# EAGLE board d11_usb_std (EAGLE 7.3.0)
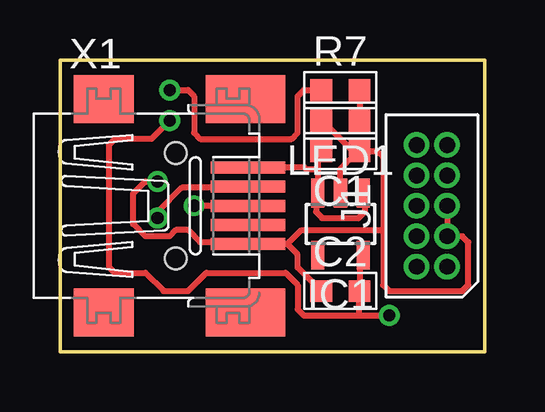
[diagram p0: board, top side]
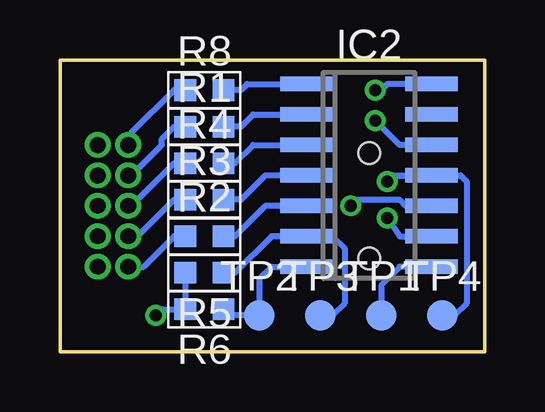
[diagram p1: board, bottom side, seen from below]

Size 17.7 x 12.18 mm. Coordinates in mm from the lower left corner, seen from the top.
Outline: 0,0 17.7,0 17.7,12.18 0,12.18 0,0
Copper layers (1*16): Top 0.0356mm / dielectric 1.5011mm / Bottom 0.0356mm
Design rules "OSHPark": minimum track width 6mil, minimum drill 13mil, track to track 6mil, track to pad 6mil, pad to pad 6mil, via to via 6mil, smd to smd 6mil, copper to edge 15mil, drill to drill 6mil, minimum pad ring 7mil, minimum via ring 7mil, stop-mask expansion 3mil, vias tented up to drill 0mil, thermal gap 10mil

## Footprints (pad centres in the part's own frame; a part is rotated, then mirrored left to right if it is on the bottom)
SMD0603 = smd 0.9 x 0.9: 1 -0.8,0; 2 0.8,0
SOT23-5 = smd 0.55 x 1.2: 1 -0.95,-1.3; 2 0,-1.3; 3 0.95,-1.3; 4 0.95,1.3; 5 -0.95,1.3
SO-14 = smd 0.6 x 2.2: 1 -3.81,-2.6; 2 -2.54,-2.6; 3 -1.27,-2.6; 4 0,-2.6; 5 1.27,-2.6; 6 2.54,-2.6; 7 3.81,-2.6; 8 3.81,2.6; 9 2.54,2.6; 10 1.27,2.6; 11 0,2.6; 12 -1.27,2.6; 13 -2.54,2.6; 14 -3.81,2.6
HEADER-5X2-1.27MM = drill 0.66 pad 1.067: 1 -2.54,-0.635; 2 -2.54,0.635; 3 -1.27,-0.635; 4 -1.27,0.635; 5 0,-0.635; 6 0,0.635; 7 1.27,-0.635; 8 1.27,0.635; 9 2.54,-0.635; 10 2.54,0.635
TP-1.27MM = smd 1.27 x 1.27: 1 0,0
32005-201 = smd 3.1 x 0.5: 1 3,1.6; 2 3,0.8; 3 3,0; 4 3,-0.8; 5 3,-1.6 | smd 2.5 x 2: M1 -3,-4.45; M2 -3,4.45 | smd 3.3 x 2: M3 2.9,4.45; M4 2.9,-4.45 | hole 0.9: 0,2.2; 0,-2.2

## Placement (x,y rotation side)
C1  1uF  [SMD0603]  11.68,8.38 180 top
C2  1uF  [SMD0603]  11.68,2.54 0 top
IC1  MIC5504-3.3  [SOT23-5]  11.68,5.33 180 top
IC2  ATSAMD11C  [SO-14]  4.83,7.37 270 bottom
J1  HEADER-5X2-TH-1.27  [HEADER-5X2-1.27MM]  15.49,6.1 90 top
LED1  [SMD0603]  11.68,9.65 180 top
R1  330  [SMD0603]  11.68,9.4 0 bottom
R2  330  [SMD0603]  11.68,4.83 0 bottom
R3  330  [SMD0603]  11.68,6.35 0 bottom
R4  330  [SMD0603]  11.68,7.87 0 bottom
R5  100K  [SMD0603]  11.68,3.3 180 bottom
R6  100K  [SMD0603]  11.68,1.78 180 bottom
R7  330  [SMD0603]  11.68,10.92 0 top
R8  330  [SMD0603]  11.68,10.92 0 bottom
TP1  SIO  [TP-1.27MM]  4.32,1.52 0 bottom
TP2  [TP-1.27MM]  9.4,1.52 0 bottom
TP3  [TP-1.27MM]  6.86,1.52 0 bottom
TP4  [TP-1.27MM]  1.78,1.52 0 bottom
X1  MINI-USB-32005-201  [32005-201]  4.83,6.1 0 top

## Library data of the parts
C1 C2 R1-R8 = ataradov_rlc
IC1 = ataradov_vreg
IC2 = ataradov_mcu
J1 = ataradov_conn
LED1 = ataradov_led
TP1-TP4 = ataradov_misc
X1 = con-cypressindustries; OC_FARNELL: unknown; OC_NEWARK: unknown

## Nets
+3V3: C2.2 IC1.5 IC2.12 R5.2 R6.2
GND: C1.1 C2.1 IC1.2 IC2.11 J1.3 J1.5 LED1.2 TP4.1 X1.5
N$1: IC2.9 X1.2
N$2: IC2.10 X1.3
N$3: LED1.1 R7.2
N$5: J1.2 R2.1
N$9: J1.4 R3.1
N$10: J1.6 R4.1
N$11: J1.8 R1.1
N$12: J1.10 R8.1
PA02: IC2.13
PA04: IC2.14 R7.1
PA05: IC2.1 R8.2
PA08: IC2.2 R1.2
PA09: IC2.3 R4.2
PA14: IC2.4 R3.2
PA15: IC2.5 R2.2
RESET: IC2.6 R5.1 TP3.1
SWCLK: IC2.7 R6.1 TP2.1
SWDIO: IC2.8 TP1.1
V_USB: C1.2 IC1.1 IC1.3 X1.1

## Tracks (layer width: path | path; a pad name or v marks a point on that pad's centre or on a via)
+3V3  (via drill 0.51 pad 0.25)
  Top 0.254: v4.57,9.65 3.81,8.89 2.29,8.89 2.03,8.64 2.03,3.56 2.29,3.3 3.56,3.3 4.32,2.54 5.33,2.54 6.1,3.3 9.4,3.3 9.91,2.79 9.91,1.78 10.16,1.52 12.45,1.52 | 12.45,1.52 v13.72,1.52 | 12.45,1.52 12.45,2.5 C2.2 12.48,3.88 IC1.5
  Bottom 0.254: IC2.12 3.56,8.64 v4.57,9.65 | R5.2 R6.2 13.46,1.78 v13.72,1.52
GND  (via drill 0.51 pad 0.25)
  Top 0.254: v4.06,7.11 3.56,7.11 3.05,6.6 3.05,5.33 3.56,4.83 4.57,4.83 4.83,5.08 5.33,5.08 5.84,4.57 7.75,4.57 X1.5 9.47,4.5 | IC1.2 11.68,7.62 12.45,8.38 | 12.45,8.38 C1.1 13.21,8.38 13.46,8.13 13.46,5.08 | 9.47,4.5 9.91,4.06 9.91,3.52 C2.1 10.92,2.5 | J1.5 J1.3 16.76,4.83 17.02,4.57 17.02,2.79 16.76,2.54 13.72,2.54 13.46,2.79 13.46,5.08 | 9.47,4.5 10.06,5.08 13.46,5.08 | 12.45,8.38 12.19,8.38 10.92,9.65 LED1.2
  Bottom 0.254: TP4.1 1.27,1.52 0.76,2.03 0.76,7.11 1.02,7.37 IC2.11 3.81,7.37 v4.06,7.11
N$1  (via drill 0.51 pad 0.25)
  Top 0.254: X1.2 7.79,6.86 5.08,6.86 4.06,5.84 v4.06,5.59
  Bottom 0.254: v4.06,5.59 3.56,4.83 IC2.9
N$2  (via drill 0.51 pad 0.25)
  Top 0.254: X1.3 v5.59,6.1
  Bottom 0.254: v5.59,6.1 5.33,6.35 3.56,6.35 3.3,6.1 IC2.10
N$3
  Top 0.254: R7.2 LED1.1
N$5
  Bottom 0.254: J1.2 14.22,3.56 12.95,4.83 R2.1
N$9
  Bottom 0.254: J1.4 14.48,4.83 12.95,6.35 R3.1
N$10
  Bottom 0.254: J1.6 14.73,6.1 12.95,7.87 R4.1
N$11
  Bottom 0.254: J1.8 14.73,7.37 13.46,8.64 13.46,8.89 12.95,9.4 R1.1
N$12
  Bottom 0.254: J1.10 14.73,8.76 14.73,9.14 12.95,10.92 R8.1
PA04  (via drill 0.51 pad 0.25)
  Top 0.254: v4.57,10.92 5.33,10.92 5.59,10.67 5.59,9.14 5.84,8.89 9.65,8.89 9.91,9.14 9.91,10.67 10.16,10.92 R7.1
  Bottom 0.254: IC2.14 4.06,11.18 4.32,10.92 v4.57,10.92
PA05
  Bottom 0.254: R8.2 10.16,10.92 9.91,11.18 IC2.1
PA08
  Bottom 0.254: R1.2 10.16,9.4 9.65,9.91 IC2.2
PA09
  Bottom 0.254: R4.2 10.41,7.87 9.65,8.64 IC2.3
PA14
  Bottom 0.254: IC2.4 9.14,7.37 10.16,6.35 R3.2
PA15
  Bottom 0.254: IC2.5 9.14,6.1 10.41,4.83 R2.2
RESET
  Bottom 0.254: TP3.1 6.35,1.52 5.84,2.03 5.84,4.32 6.35,4.83 IC2.6 8.89,4.83 10.41,3.3 R5.1
SWCLK
  Bottom 0.254: IC2.7 8.89,3.56 9.4,3.05 TP2.1 10.67,1.52 10.67,1.78 R6.1
SWDIO
  Bottom 0.254: IC2.8 3.56,3.56 4.32,2.79 TP1.1
V_USB
  Top 0.254: C1.2 10.73,8.23 10.73,7.62 | 10.73,7.62 IC1.3 10.67,6.82 10.67,5.84 10.92,5.59 12.45,5.59 12.7,5.84 12.7,6.82 IC1.1 | X1.1 10.18,7.7 10.26,7.62 10.73,7.62

## Text on the board
tValues: 1
bValues: AT | 3/25/17